# Altium PCB PCB_转接板2_不含压缩推杆控制.pcbdoc
Units mm, origin at the board's own origin, x right, y up, seen from the top; angles counter-clockwise.
Board outline 99.82 x 24.38 mm, 2 copper layers (Top Layer, Bottom Layer); 11 components, 31 nets, 57 pads, 0 vias.
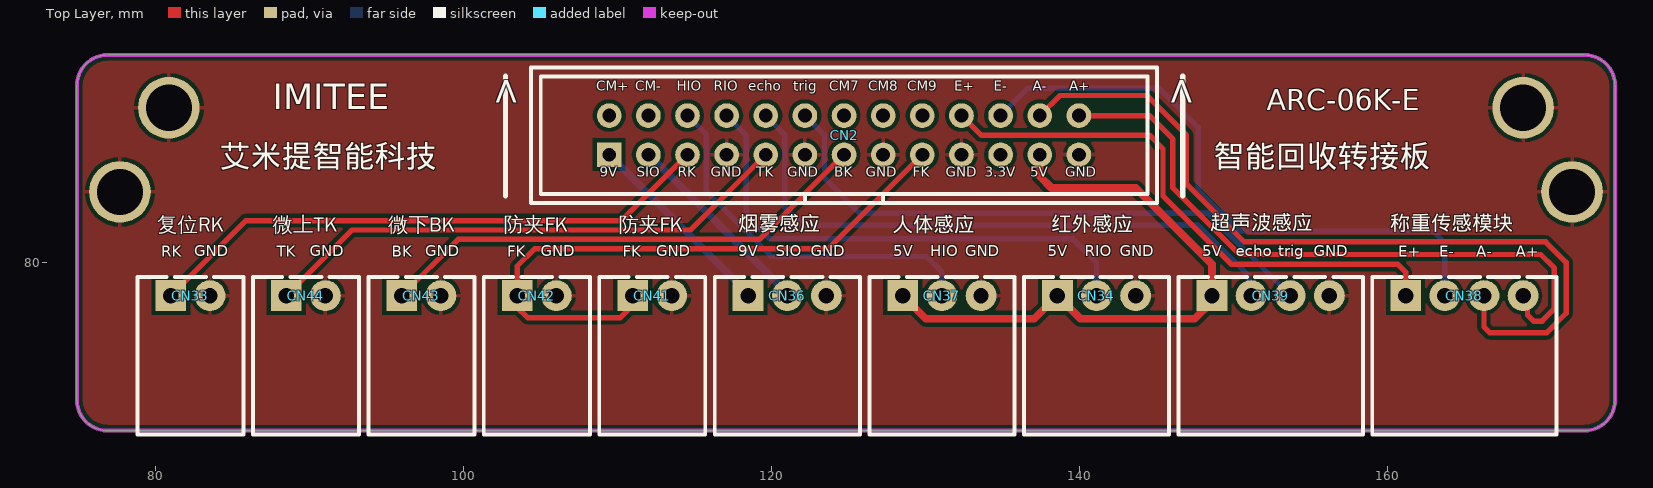
[diagram p0: Top Layer view]
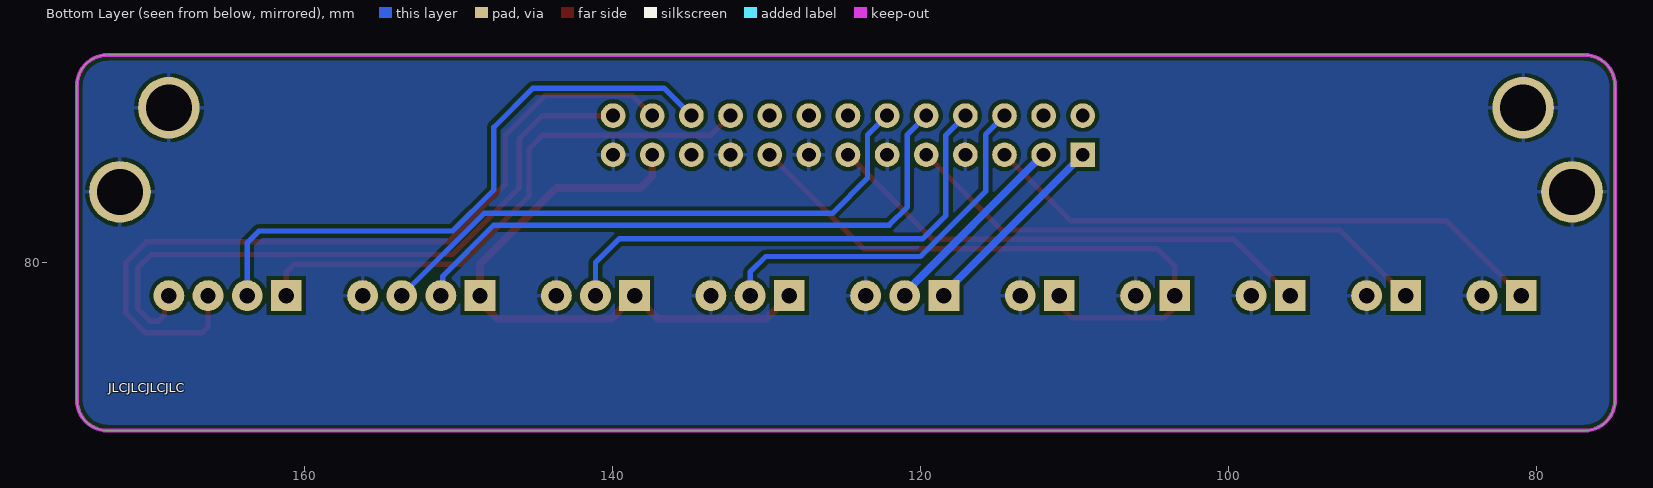
[diagram p1: Bottom Layer view, seen from below]

## Layer stack, top to bottom
Top Solder: solder mask 0.0102, Solder Resist, Dk 3.5
Top Layer: signal copper 0.0356
Dielectric1: dielectric 0.32, FR-4, Dk 4.8
Bottom Layer: signal copper 0.0356
Bottom Solder: solder mask 0.0102, Solder Resist, Dk 3.5

## Board outline
74.93,71.089 ccw(c76.93,71.089) 76.93,69.089 172.752,69.089 ccw(c172.752,71.089) 174.752,71.089 174.752,91.473 ccw(c172.752,91.473) 172.752,93.473 76.93,93.473 ccw(c76.93,91.473) 74.93,91.473

## Design rules (kind name [scope] priority, off if disabled: settings)
Clearance [All] p1: gap=0.254 ignorepadtopadclearanceinfootprint=FALSE except(0: Arc-Hole Track-Hole SMDPad-Hole THPad-Hole Via-Hole Fill-Hole Poly-Hole Region-Hole Text-Hole)
PolygonConnect [All] p1: connectstyle=Relief reliefconductorwidth=0.254 reliefentries=4 polygonreliefangle="90 Angle" airgapwidth=0.254
RoutingVias [All] p1: holewidth=0.711 width=1.27 viastyle="Through Hole" minholewidth=0.711 minwidth=1.27 maxholewidth=0.711 maxwidth=1.27
SolderMaskExpansion [All] p1: expansion=0.102
Width [All] p1: maxlimit=0.5 minlimit=0.254 preferedwidth=0.35 minimp=50.000000 maximp=50.000000 favimp=50.000000
30 further rules are at their usual default settings.

## Components (designator, comment, footprint, x,y, rotation, side; value= is the part's Value field where it differs from the comment)
CN2 "Shenzhen" CONN-TH_26P-P2.54_B-3000S26P-0110 124.714,88.265 r0 top (schematic designator CN1)
CN33 "KF2EDGR-2.54-2P" CONN-TH_P2.54_KF2EDGR-2.54-2P 82.296,77.851 r0 top
CN34 "KF2EDGR-2.54-3P" CONN-TH_3P-P2.54_KF2EDGR-2.54-3P 141.097,77.851 r0 top
CN36 "KF2EDGR-2.54-3P" CONN-TH_3P-P2.54_KF2EDGR-2.54-3P 121.031,77.851 r0 top
CN37 "KF2EDGR-2.54-3P" CONN-TH_3P-P2.54_KF2EDGR-2.54-3P 131.064,77.851 r0 top (schematic designator CN36)
CN38 "KF2EDGR-2.54-4P" CONN-TH_4P-P2.54_KF2EDGR-2.54-4P 164.973,77.851 r0 top
CN39 "KF2EDGR-2.54-4P" CONN-TH_4P-P2.54_KF2EDGR-2.54-4P 152.4,77.851 r0 top
CN41 "KF2EDGR-2.54-2P" CONN-TH_P2.54_KF2EDGR-2.54-2P 112.268,77.851 r0 top
CN42 "KF2EDGR-2.54-2P" CONN-TH_P2.54_KF2EDGR-2.54-2P 104.775,77.851 r0 top
CN43 "KF2EDGR-2.54-2P" CONN-TH_P2.54_KF2EDGR-2.54-2P 97.282,77.851 r0 top
CN44 "KF2EDGR-2.54-2P" CONN-TH_P2.54_KF2EDGR-2.54-2P 89.789,77.851 r0 top

## Footprints (in the part's own frame and the unit in brackets; to place one, negate y for a bottom-side part, rotate by r counter-clockwise, add the part's x,y. Pads: shape width x height; smd on the part's side, far side on the other; paste and mask are expansions set on the pad)
CONN-TH_3P-P2.54_KF2EDGR-2.54-3P [mm]
  rect 2x2 hole 1: 1(-2.54,0)
  round 2 hole 1: 2(0,0) 3(2.54,0)
  silkscreen extent -4.71,-9 4.71,1.2
CONN-TH_4P-P2.54_KF2EDGR-2.54-4P [mm]
  rect 2x2 hole 1: 1(-3.81,0)
  round 2 hole 1: 2(-1.27,0) 3(1.27,0) 4(3.81,0)
  silkscreen extent -5.98,-9 5.98,1.2
CONN-TH_26P-P2.54_B-3000S26P-0110 [mm]
  rect 1.6x1.6 hole 0.9: 1(-15.24,-1.27)
  round 1.6 hole 0.9: 2(-15.24,1.27) 3(-12.7,-1.27) 4(-12.7,1.27) 5(-10.16,-1.27) 6(-10.16,1.27) 7(-7.62,-1.27) 8(-7.62,1.27) 9(-5.08,-1.27) 10(-5.08,1.27) 11(-2.54,-1.27) 12(-2.54,1.27) 13(0,-1.27) 14(0,1.27) 15(2.54,-1.27) 16(2.54,1.27) 17(5.08,-1.27) 18(5.08,1.27) 19(7.62,-1.27) 20(7.62,1.27) 21(10.16,-1.27) 22(10.16,1.27) 23(12.7,-1.27) 24(12.7,1.27) 25(15.24,-1.27) 26(15.24,1.27)
  silkscreen extent -20.31,-4.4 20.31,4.4
CONN-TH_P2.54_KF2EDGR-2.54-2P [mm]
  rect 2x2 hole 1: 1(-1.27,0)
  round 2 hole 1: 2(1.27,0)
  silkscreen extent -3.44,-9 3.44,1.2

## Free pads (board coordinates)
  round 4 hole 3: ""(77.724,84.582) ""(80.899,90.043) ""(168.783,90.043) ""(171.958,84.582)

## Nets (pads, with @x,y where several pads share a name; then routed paths per layer and width w, separated by ;. In a path a pad name is that pad's centre, name@x,y a point inside that pad or via, vN(x,y) a via of type N, cw(c..) or ccw(c..) an arc to the next point about the centre after c; other vN are vias at no path point)
3.3V: CN2.21
5V: CN2.23 CN34.1 CN37.1 CN39.1 | length 39.8
  Top Layer w0.5: CN37.1 130.028,76.347 137.053,76.347 CN34.1 140.061,76.347 147.467,76.347 148.59,77.47 CN39.1 148.59,79.883 143.637,84.836 138.176,84.836 137.414,85.598 CN2.23
9V: CN2.1 CN36.1 | length 12.9
  Bottom Layer w0.5: CN2.1 117.741,78.728 117.741,78.601 CN36.1
A1: 
A2: 
A3: 
A4: 
A+: CN2.26 CN38.4 | length 43.1
  Top Layer w0.35: CN2.26 144.526,89.535 146.05,88.011 146.05,84.836 150.368,80.518 169.926,80.518 170.815,79.629 170.815,77.001 170.014,76.2 169.457,76.2 169.07,76.587 169.07,77.564 CN38.4
A-: CN2.24 CN38.3 | length 52.4
  Top Layer w0.35: CN2.24 138.718,90.839 144.365,90.839 146.939,88.265 146.939,85.09 150.686,81.343 170.244,81.343 171.577,80.01 171.577,76.708 170.307,75.438 166.624,75.438 166.243,75.819 CN38.3
CM7: CN2.14
CM8: CN2.16
CM9: CN2.18
CM+: CN2.2
CM-: CN2.4
DK: CN2.13 CN43.1 | length 32.5
  Top Layer w0.35: CN43.1 99.669,81.508 119.227,81.508 CN2.13
E+: CN2.20 CN38.1 | length 36.3
  Top Layer w0.35: CN2.20 133.604,88.265 144.526,88.265 145.415,87.376 145.415,84.328 149.86,79.883 160.655,79.883 161.163,79.375 CN38.1
E-: CN2.22 CN38.2 | length 39.5
  Bottom Layer w0.35: CN2.22 136.652,91.313 145.161,91.313 147.701,88.773 147.701,84.709 150.368,82.042 162.941,82.042 163.703,81.28 CN38.2
ECHO: CN2.10 CN39.2 | length 39.8
  Bottom Layer w0.35: CN2.10 120.863,88.306 120.863,83.607 122.047,82.423 147.701,82.423 151.002,79.122 151.002,77.979 CN39.2
FK: CN2.17 CN41.1 CN42.1 | length 40.7
  Top Layer w0.35: CN41.1 110.998,77.216 110.204,76.422 104.172,76.422 103.505,77.089 CN42.1 103.505,79.756 104.653,80.904 123.703,80.904 CN2.17
GND: CN2.7 CN2.11 CN2.15 CN2.19 CN2.25 CN33.2 CN34.3 CN36.3 CN37.3 CN39.4 CN41.2 CN42.2 CN43.2 CN44.2 pad.
HIO: CN2.6 CN37.2 | length 24.3
  Bottom Layer w0.35: CN2.6 115.783,88.306 115.783,84.623 120.015,80.391 130.048,80.391 131.064,79.375 CN37.2@131.064,77.978
IO1: 
IO2: 
IO3: 
IO4: 
IO5: 
RIO: CN2.8 CN34.2 | length 33.2
  Bottom Layer w0.35: CN2.8 118.364,88.265 118.364,83.058 119.888,81.534 139.573,81.534 141.097,80.01 CN34.2
RK: CN2.5 CN33.1 | length 37.3
  Top Layer w0.35: CN33.1 85.891,82.716 110.275,82.716 CN2.5
SIO: CN2.3 CN36.2 | length 12.9
  Bottom Layer w0.5: CN2.3 112.06,86.995 121.031,78.024 CN36.2
TK: CN2.9 CN44.1 | length 34.9
  Top Layer w0.35: CN44.1 92.78,82.112 114.751,82.112 CN2.9
TRIG: CN2.12 CN39.3 | length 38
  Bottom Layer w0.35: CN2.12 123.444,88.265 123.444,85.471 125.73,83.185 148.336,83.185 CN39.3

## Polygon pours and split planes (outlines as drawn)
GND on Top Layer "Top Layer-No Net" (solid, pour order 2): 74.93,93.345 74.93,93.218 74.93,69.088 75.057,69.215 174.752,69.215 174.752,93.472 74.93,93.472
GND on Bottom Layer "Top Layer-No Net 1" (solid, pour order 0): 74.93,93.345 74.93,93.218 74.93,69.088 75.057,69.215 174.752,69.215 174.752,93.472 74.93,93.472

## Keep-outs
Keep-Out Layer:
  the board outline again, w0.254

## Silkscreen, mask and mechanical layers (free items; w line width, h text height)
Top Overlay:
  lines w0.35: 102.743,84.328 102.743,92.075 ; 146.685,84.328 146.685,92.075
  text "V" at 102.108,92.329 h2.5 r180
  text "V" at 147.32,92.329 h2.5 r180
  text "echo" at 118.491,90.932 h1.1
  text "trig" at 121.412,90.932 h1.1
  text "A+" at 139.319,90.932 h1.1
  text "CM+" at 108.635,90.912 h1.1
  text "CM-" at 111.175,90.912 h1.1
  text "HIO" at 113.842,90.912 h1.1
  text "RIO" at 116.255,90.912 h1.1
  text "CM7" at 123.748,90.912 h1.1
  text "CM8" at 126.288,90.912 h1.1
  text "CM9" at 128.828,90.912 h1.1
  text "E+" at 131.876,90.912 h1.1
  text "E-" at 134.416,90.912 h1.1
  text "A-" at 136.956,90.912 h1.1
  text "ARC-06K-E" at 152.146,89.436 h2.33
  text "IMITEE" at 87.63,89.408 h2.83
  text "艾米提智能科技" at 84.201,85.695 h2.5
  text "智能回收转接板" at 148.717,85.693 h2.5
  text "SIO" at 111.252,85.344 h1.1
  text "GND" at 116.078,85.344 h1.1
  text "GND" at 121.031,85.344 h1.1
  text "GND" at 126.111,85.344 h1.1
  text "FK" at 129.159,85.344 h1.1
  text "GND" at 131.318,85.344 h1.1
  text "3.3V" at 133.858,85.344 h1.1
  text "9V" at 108.854,85.324 h1.1
  text "RK" at 113.934,85.324 h1.1
  text "TK" at 119.014,85.324 h1.1
  text "BK" at 124.094,85.324 h1.1
  text "5V" at 136.794,85.324 h1.1
  text "GND" at 139.08,85.324 h1.1
  text "超声波感应" at 148.463,81.788 h1.68
  text "称重传感模块" at 160.147,81.757 h1.68
  text "烟雾感应" at 117.856,81.736 h1.68
  text "红外感应" at 138.176,81.704 h1.68
  text "复位RK" at 80.137,81.661 h1.68
  text "微上TK" at 87.63,81.661 h1.68
  text "微下BK" at 95.123,81.661 h1.68
  text "防夹FK" at 102.616,81.661 h1.68
  text "防夹FK" at 110.109,81.661 h1.68
  text "人体感应" at 127.889,81.661 h1.68
  text "GND" at 82.55,80.137 h1.23
  text "GND" at 90.043,80.137 h1.23
  text "GND" at 97.536,80.137 h1.23
  text "GND" at 105.029,80.137 h1.23
  text "GND" at 112.522,80.137 h1.23
  text "9V" at 117.856,80.137 h1.23
  text "SIO" at 120.284,80.137 h1.23
  text "GND" at 122.555,80.137 h1.23
  text "5V" at 127.904,80.137 h1.23
  text "HIO" at 130.317,80.137 h1.23
  text "GND" at 132.588,80.137 h1.23
  text "5V" at 137.937,80.137 h1.23
  text "RIO" at 140.35,80.137 h1.23
  text "GND" at 142.621,80.137 h1.23
  text "5V" at 147.955,80.137 h1.23
  text "echo" at 150.129,80.137 h1.23
  text "trig" at 152.908,80.137 h1.23
  text "GND" at 155.194,80.137 h1.23
  text "RK" at 80.391,80.124 h1.23
  text "TK" at 87.884,80.124 h1.23
  text "BK" at 95.377,80.124 h1.23
  text "FK" at 102.87,80.124 h1.23
  text "FK" at 110.363,80.124 h1.23
  text "E+" at 160.67,80.124 h1.23
  text "E-" at 163.337,80.124 h1.23
  text "A-" at 165.75,80.124 h1.23
  text "A+" at 168.29,80.124 h1.23
Bottom Overlay:
  text "JLCJLCJLCJLC" at 172.72,71.374 h1
Document:
  lines w0.003: 88.552,84.612 88.603,84.662